# Altium PCB 384X_PWMMOD.PcbDoc
Units mm, origin at the board's own origin, x right, y up, seen from the top; angles counter-clockwise.
Board outline 32.5 x 16.5 mm, 2 copper layers (Top Layer, Bottom Layer), stack 1.571 mm thick; 26 components, 20 nets, 69 pads, 0 vias.
Unrouted connection lines stored in the file: 2.
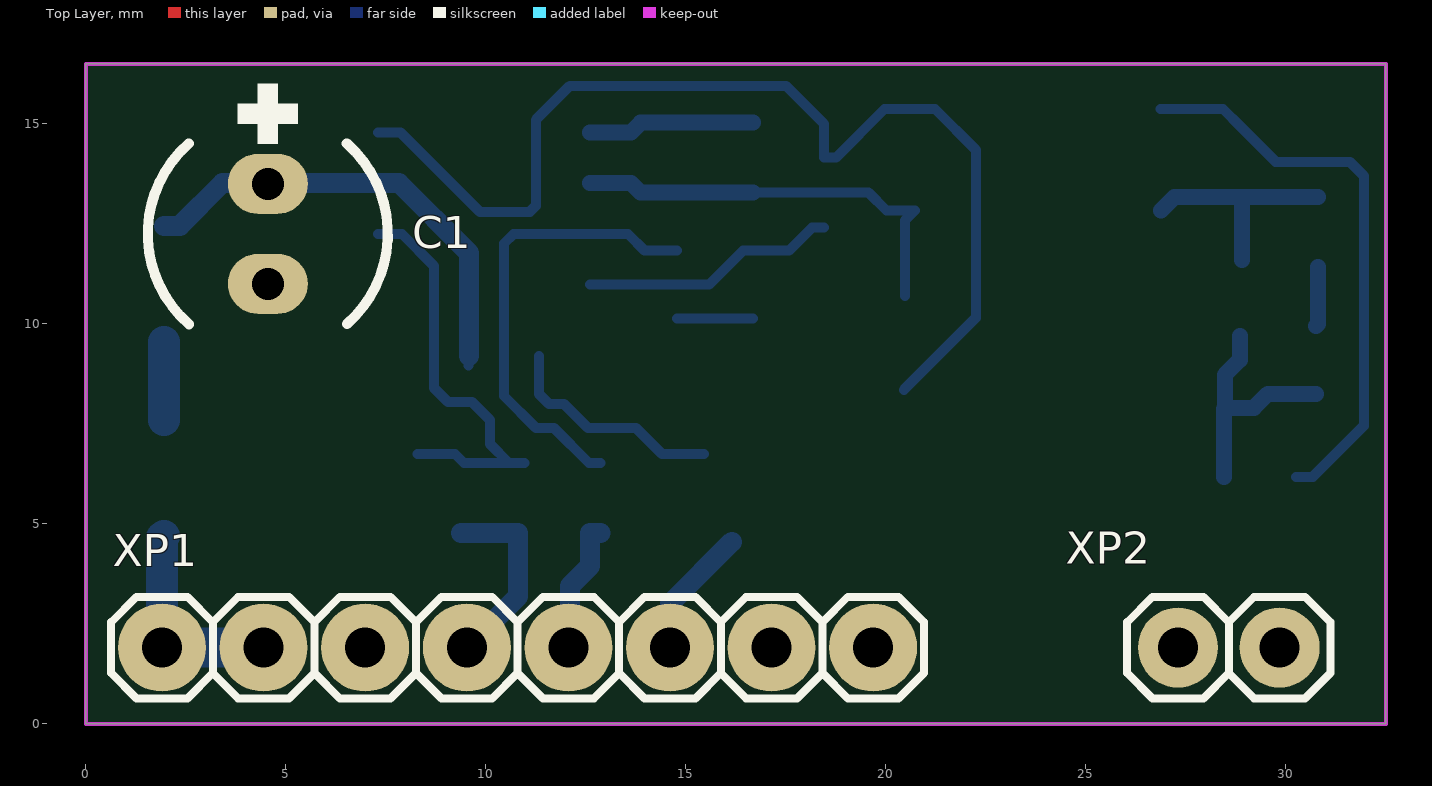
[diagram p0: Top Layer view]
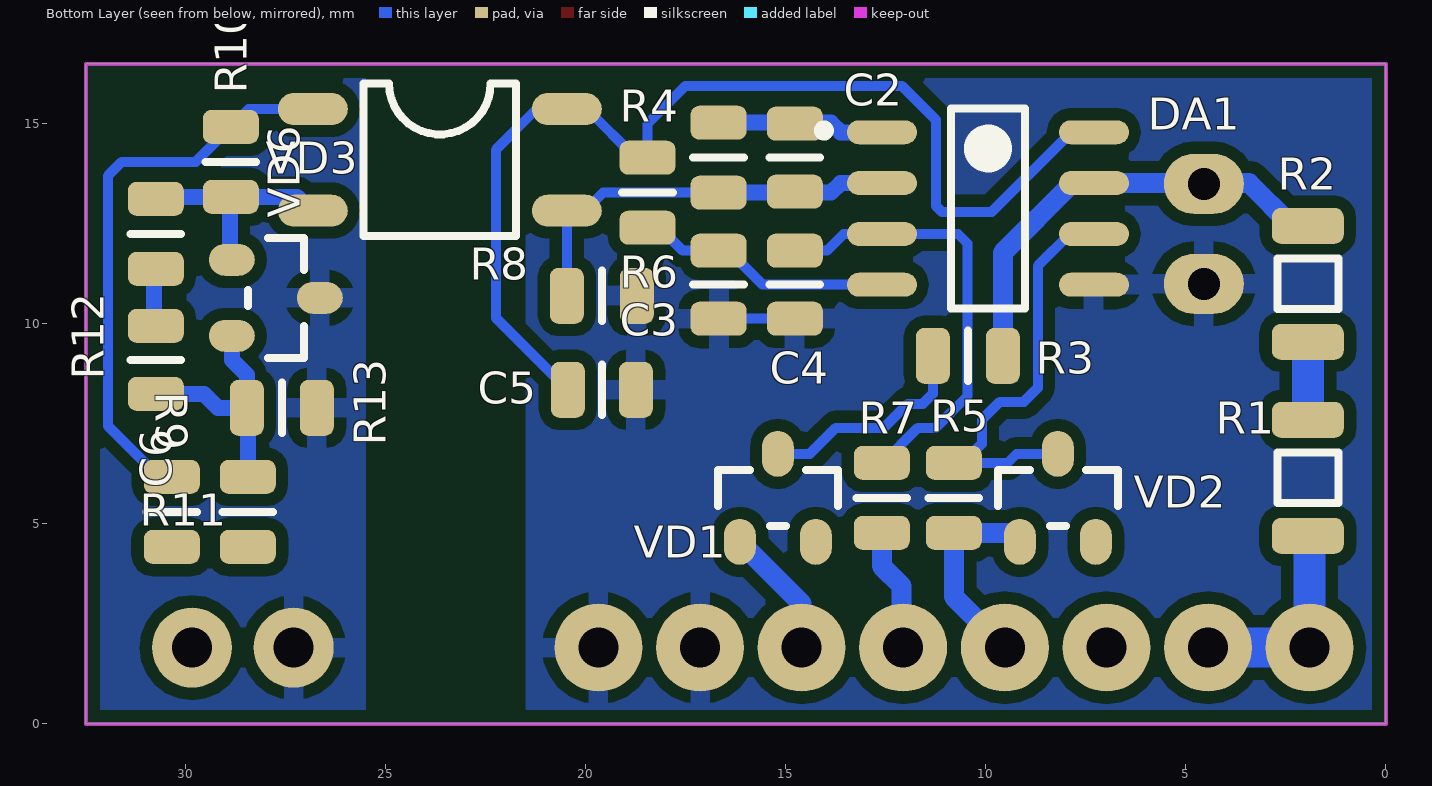
[diagram p1: Bottom Layer view, seen from below]

## Layer stack, top to bottom
Top Solder: solder mask 0.0102, Solder Resist, Dk 3.5
Top Layer: signal copper 0.0356
Dielectric 1: dielectric 1.5, FR-4, Dk 4.8
Bottom Layer: signal copper 0.0356
Bottom Solder: solder mask 0.0102, Solder Resist, Dk 3.5

## Board outline
0,0 0,16.5 32.5,16.5 32.5,0

## Design rules (kind name [scope] priority, off if disabled: settings)
Clearance [All] p1: gap=0.3 ignorepadtopadclearanceinfootprint=FALSE except(0: Arc-Hole Track-Hole SMDPad-Hole THPad-Hole Via-Hole Fill-Hole Poly-Hole Region-Hole Text-Hole)
PlaneConnect [All] p1: planeconnectstyle=Relief reliefexpansion=0.508 reliefentries=4 reliefconductorwidth=0.4 reliefairgap=0.3
PolygonConnect [All] p1: connectstyle=Relief reliefconductorwidth=0.5 reliefentries=4 polygonreliefangle="90 Angle" airgapwidth=0.3
RoutingVias [All] p1: holewidth=0.711 width=1.27 viastyle="Through Hole" minholewidth=0.711 minwidth=1.27 maxholewidth=0.711 maxwidth=1.27
SolderMaskExpansion [All] p1: expansion=0.102
Width [All] p1: maxlimit=2 minlimit=0.2 preferedwidth=0.3
29 further rules are at their usual default settings.

## Components (designator, comment, footprint, x,y, rotation, side; value= is the part's Value field where it differs from the comment)
C1 "100uF" CAP_EL_06_11_VERT 4.55,12.25 r90 top
C2 "1nF" CAP0805R 14.775,14.153 r90 bottom
C3 "1nF" CAP0805R 16.68,10.978 r90 bottom
C4 "330pF" CAP0805R 14.775,10.978 r90 bottom
C5 "100nF" CAP0805R 19.6,8.35 r0 bottom
C6 "1nF" CAP0805R 30.75,9.1 r270 bottom
DA1 "UC3844A-D8" SOP8 9.949,12.883 r180 bottom
R1 "100k" RES1206R 1.95,6.15 r270 bottom
R2 "100k" RES1206R 1.95,11 r270 bottom
R3 "6R8" RES0805R 10.45,9.2 r0 bottom
R4 "10k" RES0805R 16.68,14.153 r90 bottom
R5 "120" RES0805R 10.8,5.65 r270 bottom
R6 "10k" RES0805R 18.458,13.278 r270 bottom
R7 "470" RES0805R 12.6,5.65 r270 bottom
R8 "10k" RES0805R 19.6,10.7 r0 bottom
R9 "1k5" RES0805R 30.35,5.3 r270 bottom
R10 "1k" RES0805R 28.875,14.05 r90 bottom
R11 "47k" RES0805R 28.45,5.3 r270 bottom
R12 "47k" RES0805R 30.75,12.25 r270 bottom
R13 "5k1" RES0805R 27.6,7.9 r0 bottom
VD1 "BAS16" SOT23 15.2,5.65 r90 bottom
VD2 "BAS16" SOT23 8.2,5.65 r90 bottom
VD3 "KB354NT" SOP4 23.65,14.1 r180 bottom
VD6 "TL431AIDBZ" SOT23 27.75,10.65 r180 bottom
XP1 "PLS" PLS-08 10.795,1.905 r0 top
XP2 "PLS" PLS-02 28.575,1.905 r0 top

## Footprints (in the part's own frame and the unit in brackets; to place one, negate y for a bottom-side part, rotate by r counter-clockwise, add the part's x,y. Pads: shape width x height; smd on the part's side, far side on the other; paste and mask are expansions set on the pad)
CAP0805R [mm] "capacitor 0805 reflow soldering"
  rrect50% 0.85x1.4 smd: 1(-0.85,0) 2(0.85,0)
  silkscreen extent 0,-0.64 0,0.64, body extent -1,-0.62 1,0.63, height 0.61
CAP_EL_06_11_VERT [mm]
  oval 1.5x2 hole 0.8: 1(1.25,0) 2(-1.25,0)
  silkscreen extent -2.26,-3 3.75,3, body extent -3.15,-3.14 3.15,3.14, height 11.01
PLS-02 [mm]
  round 2 hole 1: 1(-1.27,0) 2(1.27,0)
  silkscreen extent -2.54,-1.27 2.54,1.27, body extent -2.54,-1.27 2.54,1.27, height 8.45
PLS-08 [mm]
  round 2.2 hole 1: 1(-8.89,0) 2(-6.35,0) 3(-3.81,0) 4(-1.27,0) 5(1.27,0) 6(3.81,0) 7(6.35,0) 8(8.89,0)
  silkscreen extent -10.16,-1.27 10.16,1.27
RES0805R [mm] "resistor 0805 reflow soldering"
  rrect50% 0.85x1.4 smd: 1(-0.875,0) 2(0.875,0)
  silkscreen extent 0,-0.64 0,0.64, body extent -1,-0.62 1,0.63, height 0.61
RES1206R [mm] "resistor 1206 reflow soldering"
  rrect50% 0.9x1.8 smd: 1(-1.45,0) 2(1.45,0)
  silkscreen extent -0.64,-0.76 0.63,0.76, body extent -1.6,-0.8 1.6,0.8, height 0.61
SOP4 [mm]
  oval 1.75x0.8 smd mask+0.1: 1(-3.175,1.27) 2(-3.175,-1.27) 3(3.175,-1.27) 4(3.175,1.27)
  silkscreen extent -1.91,-1.91 1.91,1.91, body extent -3.5,-1.92 3.5,1.93, height 2.1
SOP8 [mm] "SOP, 8-Leads"
  oval 1.75x0.6 smd mask+0.1: 1(-2.65,1.905) 2(-2.65,0.635) 3(-2.65,-0.635) 4(-2.65,-1.905) 5(2.65,-1.905) 6(2.65,-0.635) 7(2.65,0.635) 8(2.65,1.905)
  silkscreen extent -4.23,-2.5 0.92,2.5, body extent -2.9,-2.4 2.9,2.4, height 1.77
SOT23 [mm]
  oval 1.15x0.8 smd mask+0.1: 1(-1.1,0.95) 2(-1.1,-0.95) 3(1.1,0)
  silkscreen extent -0.7,-1.5 0.7,1.5, body extent -1.16,-1.46 1.18,1.46, height 1

## Part data
C1: library part "SH016M0100BZF-0611 (VERT MOUNTED)", Voltage=16V, Part Number="SH016M0100BZF-0611 (VERT MOUNTED)", Table="Electrolytic THD"
C2 C3 C6: library part CC0805_1NF_50V_5%_X7R, "SMD 0805 Capacitor", Case=0805, Manufacturer=GENERIC, Manufacturer1 ComponentHeight=0.94mm, Manufacturer1 Example=AVX, Manufacturer1 Part Number=08055C102JAT2A, Tolerance=±5%, Voltage=50V, Author="I. Kuznetsov", Component Type=Standard, CreateDate=18.01.2011, HelpURL=\\cern.ch\dfs\Applications\Altium\Datasheets\CC0805_X7R_AVX.pdf, LatestRevisionDate=18.01.2011, Manufacturer Part Number=CC0805_1NF_50V_5%_X7R, Mounted=Yes, Part Description="SMD Multilayer Chip Ceramic Capacitor", Part Number=CC0805_1NF_50V_5%_X7R, Pin Count=2, SMD=Yes, Socket=No, Status=None, Table="Capacitors SMD", TC=X7R
C4: library part CC0805_330PF_50V_5%_NP0, "SMD 0805 Capacitor", Case=0805, Manufacturer=GENERIC, Manufacturer1 ComponentHeight=1.35mm, Manufacturer1 Example=PHYCOMP, Manufacturer1 Part Number=223886115331, Tolerance=±5%, Voltage=50V, Author="I. Kuznetsov", Component Type=Standard, CreateDate=03.12.2007, HelpURL=\\cern.ch\dfs\Applications\Altium\Datasheets\CC0805_NP0_PHYCOMP.pdf, LatestRevisionDate=03.12.2007, Manufacturer Part Number=CC0805_330PF_50V_5%_NP0, Mounted=Yes, Part Description="SMD Multilayer Chip Ceramic Capacitor", Part Number=CC0805_330PF_50V_5%_NP0, Pin Count=2, SMD=Yes, Socket=No, Status=Preferred, Table="Capacitors SMD", TC=NP0
C5: library part CC0805_100NF_50V_10%_X7R, "SMD 0805 Capacitor", Case=0805, Manufacturer=GENERIC, Manufacturer1 ComponentHeight=1.35mm, Manufacturer1 Example=EPCOS, Manufacturer1 Part Number=B37941K5104K62, Tolerance=±10%, Voltage=50V, Author="I. Kuznetsov", Component Type=Standard, CreateDate=03.12.2007, HelpURL=\\cern.ch\dfs\Applications\Altium\Datasheets\CC0805_X7R_EPCOS.pdf, LatestRevisionDate=03.12.2007, Manufacturer Part Number=CC0805_100NF_50V_10%_X7R, Mounted=Yes, Part Description="SMD Multilayer Chip Ceramic Capacitor", Part Number=CC0805_100NF_50V_10%_X7R, Pin Count=2, SMD=Yes, Socket=No, Status=Preferred, Table="Capacitors SMD", TC=X7R
R1 R2: library part R1206_100K_1%_0.25W_100PPM, Case=1206, Manufacturer=GENERIC, Manufacturer1 ComponentHeight=0.65mm, Manufacturer1 Example="NIC COMPONENT", Manufacturer1 Part Number=NRC12F1003TRF, Power=0.25W, Tolerance=±1%, Author="CERN DEM JLC", Component Type=Standard, CreateDate=03.12.2007, HelpURL=\\cern.ch\dfs\Applications\Altium\Datasheets\R1206_NIC_NRC.pdf, LatestRevisionDate=13.03.2008, Manufacturer Part Number=R1206_100K_1%_0.25W_100PPM, Mounted=Yes, Part Description="General Purpose Thick Film Chip Resistor", Part Number=R1206_100K_1%_0.25W_100PPM, Pin Count=2, SMD=Yes, Socket=No, Status=Preferred, Table="Resistors SMD", TC=±100ppm/°C
R3: library part R0805_6R8_1%_0.125W_200PPM, Case=0805, Manufacturer=GENERIC, Manufacturer1 ComponentHeight=0.65mm, Manufacturer1 Example="YAGEO PHYCOMP", Manufacturer1 Part Number="232273466808L or RC0805FR-076R8L", Power=0.125W, Tolerance=±1%, Author="CERN DEM JLC", Component Type=Standard, CreateDate=03.12.2007, HelpURL=\\cern.ch\dfs\Applications\Altium\Datasheets\R0805_Phycomp_RC0805.pdf, LatestRevisionDate=17.10.2012, Manufacturer Part Number=R0805_6R8_1%_0.125W_200PPM, Mounted=Yes, Part Description="General Purpose Thick Film Chip Resistor", Part Number=R0805_6R8_1%_0.125W_200PPM, Pin Count=2, SMD=Yes, Socket=No, Status=Preferred, Table="Resistors SMD", TC=±200ppm/°C
R4 R8: library part R0805_10K_1%_0.125W_100PPM, Case=0805, Manufacturer=GENERIC, Manufacturer1 ComponentHeight=0.6mm, Manufacturer1 Example="NIC COMPONENT", Manufacturer1 Part Number=NRC10F1002TRF, Power=0.125W, Tolerance=±1%, Author="CERN DEM JLC", Component Type=Standard, CreateDate=03.12.2007, HelpURL=\\cern.ch\dfs\Applications\Altium\Datasheets\R0805_NIC_NRC.pdf, LatestRevisionDate=13.03.2008, Manufacturer Part Number=R0805_10K_1%_0.125W_100PPM, Mounted=Yes, Part Description="General Purpose Thick Film Chip Resistor", Part Number=R0805_10K_1%_0.125W_100PPM, Pin Count=2, SMD=Yes, Socket=No, Status=Preferred, Table="Resistors SMD", TC=±100ppm/°C
R5: library part R0805_120R_1%_0.125W_100PPM, Case=0805, Manufacturer=GENERIC, Manufacturer1 ComponentHeight=0.6mm, Manufacturer1 Example="NIC COMPONENT", Manufacturer1 Part Number=NRC10F1200TRF, Power=0.125W, Tolerance=±1%, Author="CERN DEM JLC", Component Type=Standard, CreateDate=03.12.2007, HelpURL=\\cern.ch\dfs\Applications\Altium\Datasheets\R0805_NIC_NRC.pdf, LatestRevisionDate=13.03.2008, Manufacturer Part Number=R0805_120R_1%_0.125W_100PPM, Mounted=Yes, Part Description="General Purpose Thick Film Chip Resistor", Part Number=R0805_120R_1%_0.125W_100PPM, Pin Count=2, SMD=Yes, Socket=No, Status=Preferred, Table="Resistors SMD", TC=±100ppm/°C
R6: library part R0805_10K_0.1%_0.1W_10PPM, Case=0805, Manufacturer=GENERIC, Manufacturer1 ComponentHeight=0.6mm, Manufacturer1 Example="TYCO HOLSWORTHY", Manufacturer1 Part Number=RN73C2A10KBTG, Power=0.1W, Tolerance=±0.1%, Author="CERN DEM JLC", Component Type=Standard, CreateDate=03.12.2007, HelpURL=\\cern.ch\dfs\Applications\Altium\Datasheets\R0805_Tyco_RN73.pdf, LatestRevisionDate=13.03.2008, Manufacturer Part Number=R0805_10K_0.1%_0.1W_10PPM, Mounted=Yes, Part Description="Thin Film Chip Resistor", Part Number=R0805_10K_0.1%_0.1W_10PPM, Pin Count=2, SMD=Yes, Socket=No, Status="Not recommended", Table="Resistors SMD", TC=±10ppm
R7: library part R0805_470R_1%_0.125W_100PPM, Case=0805, Manufacturer=GENERIC, Manufacturer1 ComponentHeight=0.6mm, Manufacturer1 Example="NIC COMPONENT", Manufacturer1 Part Number=NRC10F4700TRF, Power=0.125W, Tolerance=±1%, Author="CERN DEM JLC", Component Type=Standard, CreateDate=03.12.2007, HelpURL=\\cern.ch\dfs\Applications\Altium\Datasheets\R0805_NIC_NRC.pdf, LatestRevisionDate=13.03.2008, Manufacturer Part Number=R0805_470R_1%_0.125W_100PPM, Mounted=Yes, Part Description="General Purpose Thick Film Chip Resistor", Part Number=R0805_470R_1%_0.125W_100PPM, Pin Count=2, SMD=Yes, Socket=No, Status=Preferred, Table="Resistors SMD", TC=±100ppm/°C
R9: library part R0805_1K5_1%_0.125W_100PPM, Case=0805, Manufacturer=GENERIC, Manufacturer1 ComponentHeight=0.6mm, Manufacturer1 Example="NIC COMPONENT", Manufacturer1 Part Number=NRC10F1501TRF, Power=0.125W, Tolerance=±1%, Author="CERN DEM JLC", Component Type=Standard, CreateDate=03.12.2007, HelpURL=\\cern.ch\dfs\Applications\Altium\Datasheets\R0805_NIC_NRC.pdf, LatestRevisionDate=13.03.2008, Manufacturer Part Number=R0805_1K5_1%_0.125W_100PPM, Mounted=Yes, Part Description="General Purpose Thick Film Chip Resistor", Part Number=R0805_1K5_1%_0.125W_100PPM, Pin Count=2, SMD=Yes, Socket=No, Status=Preferred, Table="Resistors SMD", TC=±100ppm/°C
R10: library part R0805_1K_1%_0.125W_100PPM, Case=0805, Manufacturer=GENERIC, Manufacturer1 ComponentHeight=0.6mm, Manufacturer1 Example="NIC COMPONENT", Manufacturer1 Part Number=NRC10F1001TRF, Power=0.125W, Tolerance=±1%, Author="CERN DEM JLC", Component Type=Standard, CreateDate=03.12.2007, HelpURL=\\cern.ch\dfs\Applications\Altium\Datasheets\R0805_NIC_NRC.pdf, LatestRevisionDate=13.03.2008, Manufacturer Part Number=R0805_1K_1%_0.125W_100PPM, Mounted=Yes, Part Description="General Purpose Thick Film Chip Resistor", Part Number=R0805_1K_1%_0.125W_100PPM, Pin Count=2, SMD=Yes, Socket=No, Status=Preferred, Table="Resistors SMD", TC=±100ppm/°C
R11 R12: library part R0805_47K_1%_0.125W_100PPM, Case=0805, Manufacturer=GENERIC, Manufacturer1 ComponentHeight=0.6mm, Manufacturer1 Example="NIC COMPONENT", Manufacturer1 Part Number=NRC10F4702TRF, Power=0.125W, Tolerance=±1%, Author="CERN DEM JLC", Component Type=Standard, CreateDate=03.12.2007, HelpURL=\\cern.ch\dfs\Applications\Altium\Datasheets\R0805_NIC_NRC.pdf, LatestRevisionDate=13.03.2008, Manufacturer Part Number=R0805_47K_1%_0.125W_100PPM, Mounted=Yes, Part Description="General Purpose Thick Film Chip Resistor", Part Number=R0805_47K_1%_0.125W_100PPM, Pin Count=2, SMD=Yes, Socket=No, Status=Preferred, Table="Resistors SMD", TC=±100ppm/°C
R13: library part R0805_5K1_1%_0.125W_100PPM, Case=0805, Manufacturer=GENERIC, Manufacturer1 ComponentHeight=0.6mm, Manufacturer1 Example="NIC COMPONENT", Manufacturer1 Part Number=NRC10F5101TRF, Power=0.125W, Tolerance=±1%, Author="CERN DEM JLC", Component Type=Standard, CreateDate=03.12.2007, HelpURL=\\cern.ch\dfs\Applications\Altium\Datasheets\R0805_NIC_NRC.pdf, LatestRevisionDate=13.03.2008, Manufacturer Part Number=R0805_5K1_1%_0.125W_100PPM, Mounted=Yes, Part Description="General Purpose Thick Film Chip Resistor", Part Number=R0805_5K1_1%_0.125W_100PPM, Pin Count=2, SMD=Yes, Socket=No, Status=Preferred, Table="Resistors SMD", TC=±100ppm/°C
VD1: "Shottky Diode", PartNumber=BAS16
XP1: library part PLS-08, Manufacturer=AUK, ComponentLink1URL=http://lib.chipdip.ru/227/DOC000227157.pdf, Component Type=Standard, Device=PLS-08, Family=PLS, Manufacturer Part Number=PLS-08, PackageDescription=PLS-08, Part Number=PLS-08, Pin Count=8, SMD=Yes, Table=AUK
XP2: library part PLS-02, Manufacturer=AUK, ComponentLink1URL=http://lib.chipdip.ru/227/DOC000227157.pdf, Component Type=Standard, Device=PLS-02, Family=PLS, Manufacturer Part Number=PLS-02, PackageDescription=PLS-02, Part Number=PLS-02, Pin Count=2, SMD=No, Table=AUK
DA1: Device=UC3844A-D8, Part Number=UC3844A-D8
VD2: Device=BAS16, Part Number=BAS16, Table=Diode
VD3: Device=KB354NT, Part Number=KB354NT, Table=Optocouplers
VD6: Device=TL431AIDBZ, Part Number=TL431AIDBZ, Table=Diode

## Nets (pads, with @x,y where several pads share a name; then routed paths per layer and width w, separated by ;. In a path a pad name is that pad's centre, name@x,y a point inside that pad or via, vN(x,y) a via of type N, cw(c..) or ccw(c..) an arc to the next point about the centre after c; other vN are vias at no path point)
+HVCC: R1.2 XP1.1 XP1.2 | length 5.4
  Bottom Layer w0.5: XP1.2@4.445,1.834 XP1.2@4.488,1.834
  Bottom Layer w0.8: XP1.1 1.905,4.655 R1.2
  Bottom Layer w1: XP1.1 XP1.2
+VBIAS: VD1.1 XP1.6 | length 3.4
  Bottom Layer w0.5: XP1.6 14.605,3.005 VD1.1 ; XP1.6@14.648,1.834 XP1.6@14.648,1.905
+VCC: R9.2 R11.2 XP2.2
GATE: R5.2 VD2.1 XP1.4 | length 4.8
  Bottom Layer w0.5: VD2.1@9.375,4.775 R5.2 10.8,3.18 XP1.4
HGND: C1.2 C3.1 C4.1 C5.1 DA1.5 R8.1 XP1.7 XP1.8 | length 1.9
  Bottom Layer w0.25: C4.1 C3.1
ISEN: R7.2 XP1.5 | length 3.4
  Bottom Layer w0.5: XP1.5@12.108,1.834 12.108,3.45 12.6,3.942 R7.2@12.6,4.7 ; R7.2 R7.2@12.6,4.7 ; R7.2@12.87,4.769 12.669,4.769 R7.2@12.6,4.7
NetC1_1: C1.1 DA1.7 R2.1 R3.1 | length 11.6
  Bottom Layer w0.25: R3.1@9.568,8.96 R3.1@9.568,9.2
  Bottom Layer w0.5: R2.1 2.35,12.45 3.418,13.518 DA1.7 7.832,13.518 9.575,11.775 R3.1
NetC2_1: C2.1 DA1.2 R4.1 R8.2 VD3.3 | length 10.6
  Bottom Layer w0.25: R4.1 19.572,13.278 20.02,12.83 20.525,12.83 20.725,12.83 20.475,12.58 R8.2
  Bottom Layer w0.4: DA1.2 13.632,13.518 13.872,13.278 R4.1
NetC2_2: C2.2 DA1.1 R4.2 | length 4.2
  Bottom Layer w0.4: DA1.1 13.632,14.788 13.872,15.028 R4.2
NetC3_2: C3.2 DA1.4 R6.2 | length 6.4
  Bottom Layer w0.25: DA1.4 15.578,10.978 16.428,11.828 17.578,11.828 18.153,12.403 R6.2
NetC4_2: C4.2 DA1.3 R7.1 | length 11.5
  Bottom Layer w0.25: R7.1@12.87,6.519 12.581,6.519 11.7,7.4 11.25,7.4 10.457,8.193 10.457,12.007 10.698,12.248 DA1.3 13.552,12.248 13.972,11.828 C4.2
NetC5_2: C5.2 DA1.8 R6.1 VD3.4 | length 27.3
  Bottom Layer w0.25: DA1.8 7.862,14.788 9.85,12.8 11.1,12.8 11.25,12.95 11.25,15.1 12.1,15.95 17.508,15.95 18.458,15 R6.1 18.753,14.153 19.97,15.37 20.525,15.37 21.23,15.37 22.25,14.35 22.25,10.15 C5.2
NetC6_1: C6.1 R12.2 | length 1.5
  Bottom Layer w0.4: C6.1 30.8,10 R12.2@30.8,11.425
NetC6_2: C6.2 R11.1 R13.2 VD6.2 | length 6.1
  Bottom Layer w0.4: R11.1 28.45,7.875 R13.2 ; VD6.2 28.85,9.1 28.475,8.725 R13.2 ; C6.2 29.55,8.25 29.2,7.9 R13.2
NetDA1_6: DA1.6 R5.1 VD2.3 | length 10.6
  Bottom Layer w0.25: DA1.6 7.902,12.248 8.7,11.45 8.7,8.4 9.05,8.05 9.65,8.05 10.1,7.6 10.1,7 R5.1@10.581,6.519 ; VD2.3@8.298,6.744 9.23,6.744 9.455,6.519 R5.1@10.581,6.519 ; R5.1@10.965,6.519 R5.1@10.581,6.519
NetR1_1: R1.1 R2.2 | length 2
  Bottom Layer w0.8: R1.1 R2.2
NetR3_2: R3.2 VD1.3 | length 5.7
  Bottom Layer w0.25: R3.2 11.325,8.25 11.575,8 11.95,8 12.55,7.4 13.75,7.4 14.4,6.75 VD1.3@15.45,6.75
NetR9_1: R9.1 R10.2 VD3.1 | length 14.2
  Bottom Layer w0.25: 29.75,14.05 31.6,14.05 31.95,13.7 31.95,7.45 30.675,6.175 R9.1 R9.1@30.25,6.175
  Bottom Layer w0.254: VD3.1@26.875,15.37 28.43,15.37 R10.2 29.75,14.05
NetR10_1: R10.1 R12.1 VD3.2 VD6.1 | length 5.7
  Bottom Layer w0.4: VD3.2@26.875,12.83 27.22,13.175 R10.1 ; VD6.1@28.9,11.6 28.9,13.15 R10.1 ; R12.1@30.8,13.175 R10.1
PGND: R13.1 VD6.3 XP2.1
pads on no net: VD1.2 VD2.2 XP1.3

## Polygon pours and split planes (outlines as drawn)
PGND on Bottom Layer "Top Layer-No Net" (solid, remove dead copper, pour order 4): 32.5,16.5 32.5,0 25.5,0 25.5,16.5
HGND on Bottom Layer "Top Layer-No Net" (solid, remove dead copper, pour order 2): 0,18 0,0 21.5,0 21.5,18

## Keep-outs
Keep-Out Layer:
  the board outline again, w0.1